# Altium PCB PCB1.PcbDoc
Units mil, origin at the board's own origin, x right, y up, seen from the top; angles counter-clockwise.
Board outline 6000 x 4000 mil, 2 copper layers (Top Layer, Bottom Layer); 2 components, 1 nets, 5 pads, 0 vias.
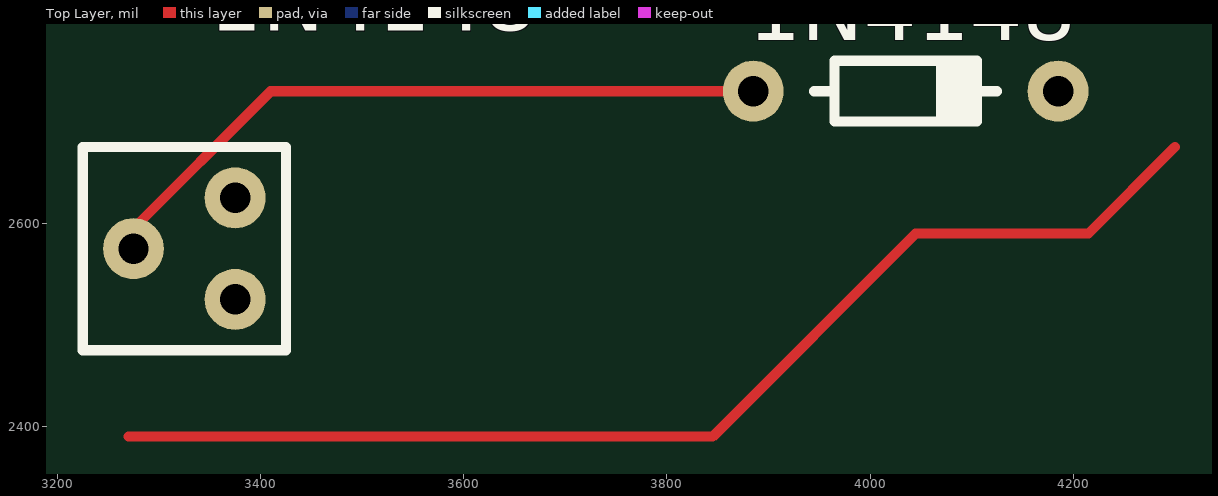
[diagram p0: Top Layer view]
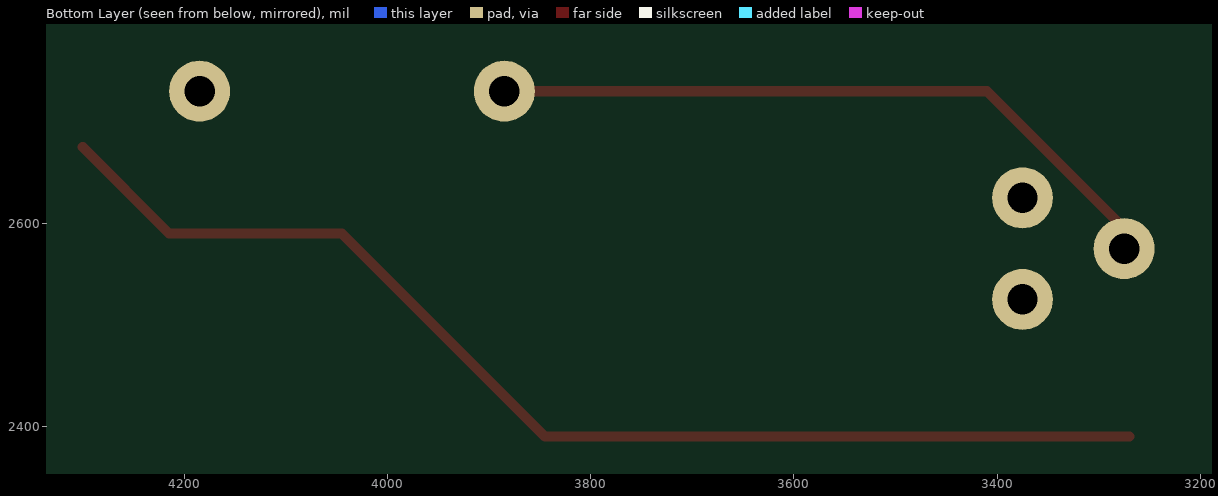
[diagram p1: Bottom Layer view, seen from below]

## Layer stack, top to bottom
Top Solder: solder mask 0.4, Solder Resist, Dk 3.5
Top Layer: signal copper 1.4
Dielectric 1: dielectric 12.6, FR-4, Dk 4.8
Bottom Layer: signal copper 1.4
Bottom Solder: solder mask 0.4, Solder Resist, Dk 3.5

## Board outline
1000,1000 7000,1000 7000,5000 1000,5000

## Design rules (kind name [scope] priority, off if disabled: settings)
Clearance [All] p1: gap=10 ignorepadtopadclearanceinfootprint=FALSE except(0: Arc-Hole Track-Hole SMDPad-Hole THPad-Hole Via-Hole Fill-Hole Poly-Hole Region-Hole Text-Hole)
PolygonConnect [All] p1: connectstyle=Relief reliefconductorwidth=10 reliefentries=4 polygonreliefangle="90 Angle" airgapwidth=10
RoutingVias [All] p1: holewidth=28 width=50 viastyle="Through Hole" minholewidth=28 minwidth=50 maxholewidth=28 maxwidth=50
SolderMaskExpansion [All] p1: expansion=4
Width [All] p1: maxlimit=10 minlimit=10 preferedwidth=10
30 further rules are at their usual default settings.

## Classes and differential pairs
component class Sheet1: 1N4148

## Components (designator, comment, footprint, x,y, rotation, side; value= is the part's Value field where it differs from the comment)
1N4148 "VD2" 123 3375,2575 r90 top (schematic designator =Model)
1N4148 "VD1" "DO-35 300mil" 4035,2730 r0 top (schematic designator =Model)

## Footprints (in the part's own frame and the unit in brackets; to place one, negate y for a bottom-side part, rotate by r counter-clockwise, add the part's x,y. Pads: shape width x height; smd on the part's side, far side on the other; paste and mask are expansions set on the pad)
123 [mil]
  round 60 hole 30: 1(-50,0) 1(50,0) 2(0,100)
  silkscreen extent -100,-50 100,150
"DO-35 300mil" [mil]
  round 60 hole 30: 1(-150,0) 2(150,0)
  silkscreen extent -90,-30 90,30, body extent -161,-35 161,35, height 72

## Part data
1N4148 1N4148: library part VD?, Model=1N4148

## Nets (pads, with @x,y where several pads share a name; then routed paths per layer and width w, separated by ;. In a path a pad name is that pad's centre, name@x,y a point inside that pad or via, vN(x,y) a via of type N, cw(c..) or ccw(c..) an arc to the next point about the centre after c; other vN are vias at no path point)
Net1N4148_1: 1N4148.1@3885,2730 1N4148.2@3275,2575 | length 673
  Top Layer w10: 1N4148.2@3270,2590 3410,2730 1N4148.1@3885,2730
pads on no net: 1N4148.1@3375,2525 1N4148.1@3375,2625 1N4148.2@4185,2730
copper on no net: | length 1148.1
  Top Layer w10: 3270,2390 3845,2390 4045,2590 4215,2590 4300,2675